# EAGLE board kombi_8relais04a (EAGLE 4.16)
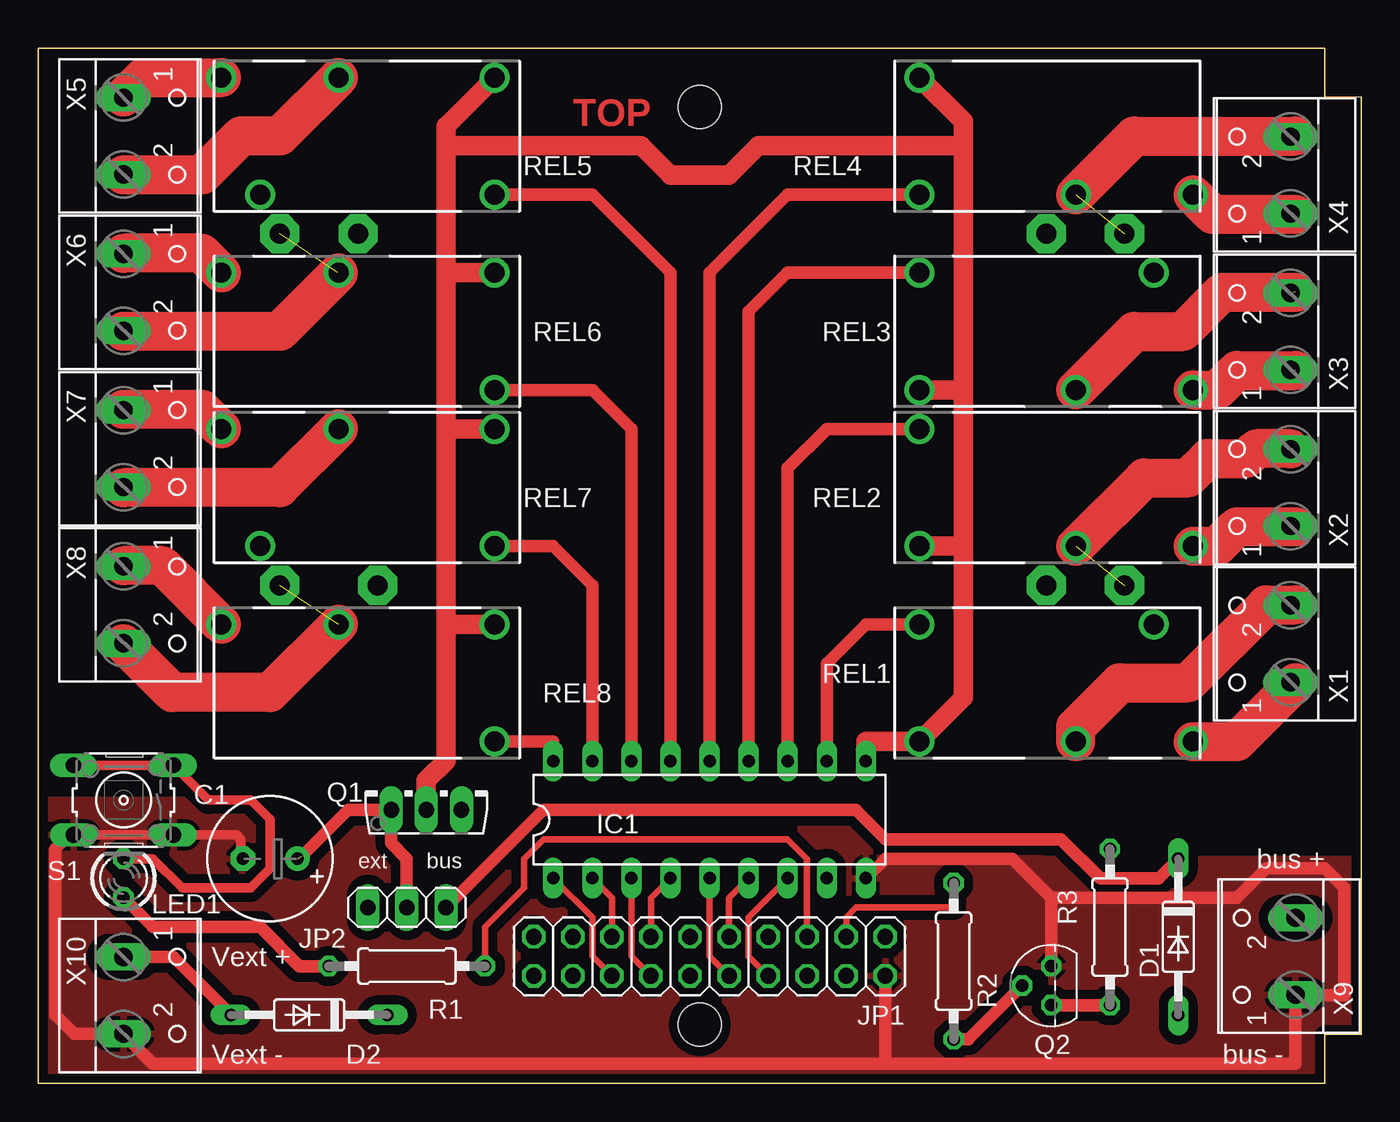
[diagram p0: board, top side]
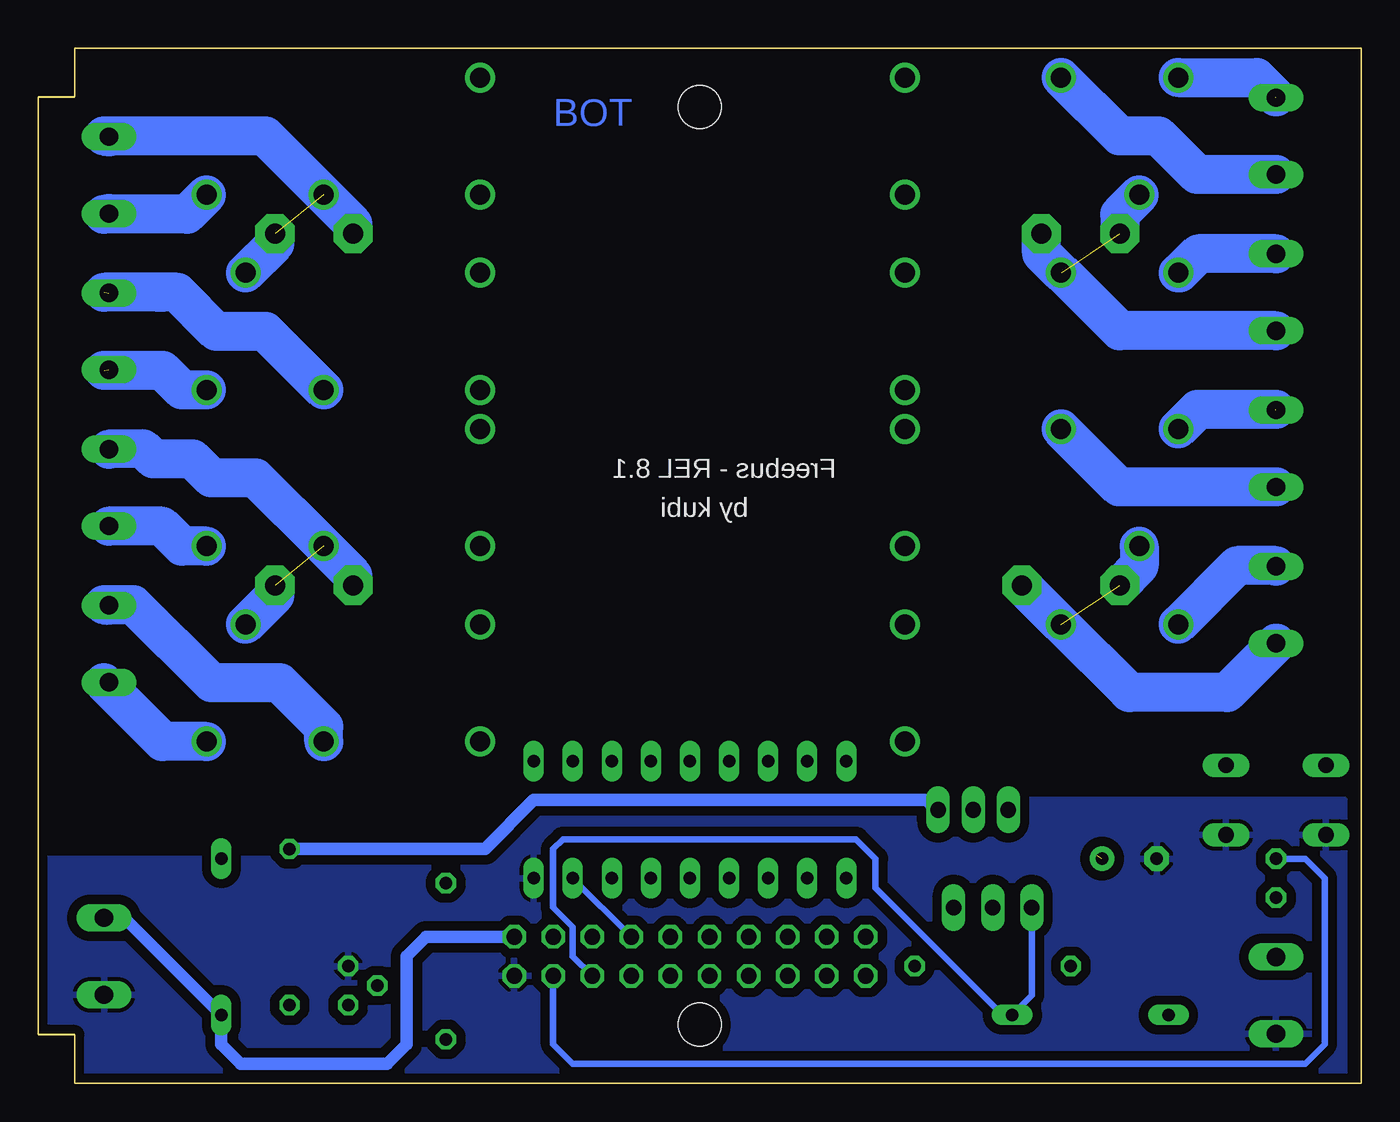
[diagram p1: board, bottom side, seen from below]

Size 86 x 67.31 mm. Coordinates in mm from the lower left corner, seen from the top.
Outline: 0,0.01 83.64,0 83.64,3.18 86,3.18 86,64.13 83.64,64.13 83.64,67.31 0,67.31 0,0.01
Copper layers (1*16): Top 0.035mm / dielectric 1.5mm / Bottom 0.035mm
Design rules "default": minimum track width 10mil, minimum drill 24mil, track to track 16mil, track to pad 12mil, pad to pad 16mil, via to via 16mil, smd to smd 8mil, copper to edge 20mil, drill to drill 10mil, minimum pad ring 10mil, minimum via ring 8mil, stop-mask expansion 4mil, vias tented up to drill 0mil, thermal gap 10mil
Holes 2.8 mm at 43,3.81 43,63.5
Milling: 8 lines

## Footprints (pad centres in the part's own frame; a part is rotated, then mirrored left to right if it is on the bottom)
E3,5-8 = drill 0.813 pad 1.6 round: + -1.778,0 | drill 0.813 pad 1.6 octagon: - 1.778,0
DO35-10 = drill 0.813 long: A 5.08,0; C -5.08,0
DIL18 = drill 0.813 long: 1 -10.16,-3.81; 2 -7.62,-3.81; 3 -5.08,-3.81; 4 -2.54,-3.81; 5 0,-3.81; 6 2.54,-3.81; 7 5.08,-3.81; 8 7.62,-3.81; 9 10.16,-3.81; 10 10.16,3.81; 11 7.62,3.81; 12 5.08,3.81; 13 2.54,3.81; 14 0,3.81; 15 -2.54,3.81; 16 -5.08,3.81; 17 -7.62,3.81; 18 -10.16,3.81
2X10 = drill 1.016 octagon: 1 -11.43,-1.27; 2 -11.43,1.27; 3 -8.89,-1.27; 4 -8.89,1.27; 5 -6.35,-1.27; 6 -6.35,1.27; 7 -3.81,-1.27; 8 -3.81,1.27; 9 -1.27,-1.27; 10 -1.27,1.27; 11 1.27,-1.27; 12 1.27,1.27; 13 3.81,-1.27; 14 3.81,1.27; 15 6.35,-1.27; 16 6.35,1.27; 17 8.89,-1.27; 18 8.89,1.27; 19 11.43,-1.27; 20 11.43,1.27
1X03 = drill 1.016 long: 1 -2.54,0; 2 0,0; 3 2.54,0
LED3MM = drill 0.813 octagon: A -1.27,0; K 1.27,0
TO126AV = drill 1.016 long: B 2.286,-1.27; C 0,-1.27; E -2.286,-1.27
TO92 = drill 0.813 octagon: 1 1.27,0; 2 0,1.905; 3 -1.27,0
0207/10 = drill 0.813 octagon: 1 -5.08,0; 2 5.08,0
G5Q_1_EU = drill 1.3 round: 11 1.27,-3.81; 12 6.35,3.81; 14 8.89,-3.81; A1 -8.89,-3.81; A2 -8.89,3.81
RE-SCHRACK = drill 1.3 round: 11 8.89,-3.81; 14 1.27,-3.81; A1 -8.89,-3.81; A2 -8.89,3.81
B3F-10XX = drill 1.016 long: 1 -3.251,2.261; 2 3.251,2.261; 3 -3.251,-2.261; 4 3.251,-2.261
W237-102 = drill 1.194 long: 1 -2.5,-1.27; 2 2.5,-1.27

## Placement (x,y rotation side)
C1  10µ  [E3,5-8]  15.06,14.61 180 top
D1  1N4148  [DO35-10]  74.11,9.53 270 top
D2  1N4148  [DO35-10]  17.6,4.45 180 top
IC1  ULN2803  [DIL18]  43.63,17.15 0 top
JP1  [2X10]  43.63,8.26 180 top
JP2  [1X03]  23.95,11.43 0 top
LED1  rot  [LED3MM]  5.54,13.33 90 top
Q1  BD138  [TO126AV]  25.22,19.05 0 top
Q2  BC547  [TO92]  65.86,6.35 90 top
R1  1k  [0207/10]  23.95,7.62 180 top
R2  10k  [0207/10]  59.51,7.94 270 top
R3  10k  [0207/10]  69.67,10.16 90 top
REL1  RE03U  [G5Q_1_EU]  66.18,26.04 0 top
REL2  G5Q-1A  [RE-SCHRACK]  66.18,38.73 0 top
REL3  RE03U  [G5Q_1_EU]  66.18,48.89 0 top
REL4  G5Q-1A  [RE-SCHRACK]  66.18,61.59 0 top
REL5  RE03U  [G5Q_1_EU]  20.77,61.59 180 top
REL6  G5Q-1A  [RE-SCHRACK]  20.77,48.89 180 top
REL7  RE03U  [G5Q_1_EU]  20.77,38.73 180 top
REL8  G5Q-1A  [RE-SCHRACK]  20.77,26.04 180 top
S1  push Prog  [B3F-10XX]  5.54,18.42 180 top
X1  [W237-102]  80.15,28.58 90 top
X2  [W237-102]  80.15,38.73 90 top
X3  [W237-102]  80.15,48.89 90 top
X4  [W237-102]  80.15,59.05 90 top
X5  [W237-102]  6.8,61.59 270 top
X6  [W237-102]  6.8,51.43 270 top
X7  [W237-102]  6.8,41.27 270 top
X8  [W237-102]  6.8,31.12 270 top
X9  [W237-102]  80.47,8.26 90 top
X10  [W237-102]  6.8,5.71 270 top

## Library data of the parts
C1 R1-R3 = rcl
D1 D2 = diode
IC1 = uln-udn
JP1 JP2 = pinhead
LED1 = led
Q1 = transistor-power
Q2 = transistor-npn
REL1 REL3 REL5 REL7 = freebus_relay
REL2 REL4 REL6 REL8 = relay
S1 = switch-omron
X1-X10 = con-wago-500

## Nets
GND: C1.- IC1.9 JP1.2 Q2.1 S1.1 S1.2 X9.1 X10.2
IO1: IC1.1 JP1.16
IO2: IC1.2 JP1.15
IO3: IC1.3 JP1.14
IO4: IC1.4 JP1.13
IO5: IC1.5 JP1.10
IO6: IC1.6 JP1.9
IO7: IC1.7 JP1.8
IO8: IC1.8 JP1.7
N$1: REL4.11 X4.1
N$3: REL3.14 X3.1
N$4: REL3.11 X3.2
N$5: REL2.11 X2.1
N$6: REL1.12 REL2.14 X2.2
N$7: REL1.14
N$8: REL1.11 X1.2
N$14: REL5.14 X5.1
N$17: D2.A X10.1
N$19: IC1.10 Q1.C REL1.A1 REL2.A1 REL3.A1 REL4.A2 REL5.A1 REL6.A1 REL7.A1 REL8.A1
N$20: D1.A JP1.1 X9.2
N$24: JP1.5 R1.1
N$27: JP1.4 LED1.K S1.3 S1.4
N$28: LED1.A R1.2
N$31: D2.C JP1.6 JP2.1
N$32: D1.C JP2.3
N$33: JP1.3 R2.1
N$37: Q1.B R3.2
N$38: Q2.3 R3.1
N$39: Q2.2 R2.2
R1: IC1.14 REL4.A1
R2: IC1.13 REL3.A2
R3: IC1.12 REL2.A2
R4: IC1.11 REL1.A2
R5: IC1.15 REL5.A2
R6: IC1.16 REL6.A2
R7: IC1.17 REL7.A2
R8: IC1.18 REL8.A2
S$1: REL5.11 X5.2
S$2: REL6.11 X6.1
S$3: REL5.12 REL6.14 X6.2
S$4: REL7.14 X7.1
S$5: REL7.11 X7.2
S$6: REL8.11 X8.1
S$7: REL7.12 REL8.14 X8.2
S$8: REL3.12 REL4.14 X4.2
VDD: C1.+ JP2.2 Q1.E

## Tracks (layer width: path | path; a pad name or v marks a point on that pad's centre or on a via)
GND
  Top 0.406: 3.27,16.15 3,15.88 2.72,16.15 S1.2
  Top 0.61: 2,16.15 S1.2 | 3.27,16.15 S1.1 12.88,16.15 13.15,15.88 13.15,14.73 arc90 C1.- | 81.73,5.71 X9.1
  Top 0.813: 55.06,1.27 7.44,1.27 5.54,3.17 X10.2 2.32,3.21 1.09,4.45 1.09,15.24 2,16.15 | 55.06,1.27 81.73,1.27 81.73,5.71 84.91,5.71 84.91,12.7 83.64,13.97 79.83,13.97 77.92,12.06 65.86,12.06 | 65.86,12.06 63.32,14.61 55.06,14.61 IC1.9 | 65.86,12.06 Q2.1 | 55.06,1.27 JP1.2
  pour Top (isolate 0.61): 0.46,18.42 27.76,18.42 27.12,18.42 62.68,18.42 65.22,14.61 85.55,14.61 85.55,3.81 83,3.81 83,0.64 0.46,0.64
  pour Bottom (isolate 0.61): 1.09,0.64 1.09,18.42 62.68,18.42 65.22,14.61 85.55,14.61 85.55,3.81 83,3.81 83,0.64
IO1
  Top 0.406: IC1.1 36.02,10.79 36.02,8.26 JP1.16
IO2
  Top 0.406: JP1.15 37.28,12.06 IC1.2
IO3
  Top 0.406: IC1.3 38.55,8.26 JP1.14
IO4
  Top 0.406: JP1.13 39.82,12.06 IC1.4
IO5
  Top 0.406: IC1.5 43.63,8.26 JP1.10
IO6
  Top 0.406: JP1.9 44.91,12.06 IC1.6
IO7
  Top 0.406: IC1.7 46.17,10.79 46.17,8.26 JP1.8
IO8
  Bottom 0.406: JP1.7 IC1.8
N$1
  Top 2.54: REL4.11 76.34,56.52 81.73,56.52
  Bottom 2.54: X4.1 81.73,56.52 76.34,56.52 REL4.11
N$3  (1 unrouted)
  Top 2.54: REL3.14 76.66,45.09 77.92,46.35 81.73,46.35
  Bottom 2.54: 81.73,46.35 77.92,46.35 76.66,45.09 REL3.14
N$4  (1 unrouted)
  Top 2.54: REL3.11 71.26,48.89 74.43,48.89 76.97,51.43 81.73,51.43
  Bottom 2.54: 78.24,51.43 77.92,51.43 | 78.24,51.43 81.73,51.43 | REL3.11 71.26,48.89 74.43,48.89 76.97,51.43 78.24,51.43
N$5
  Top 2.54: REL2.11 76.66,34.92 77.92,36.2 81.73,36.2
  Bottom 2.54: X2.1 77.97,36.23 76.66,34.92 REL2.11
N$6  (via drill 1.3 pad 2.54)  (1 unrouted)
  Top 2.54: REL2.14 71.89,39.37 74.75,39.37 76.02,40.63 78.56,40.64 79.19,41.27 81.42,41.27
  Bottom 2.54: v65.54,32.38 65.54,33.02 REL2.14 71.89,39.37 74.75,39.37 75.98,40.6 78.52,40.6 79.19,41.27 X2.2 | v70.62,32.38 70.62,31.75 REL1.12
N$7
  Top 2.54: 81.73,26.04 77.92,22.23 REL1.14
  Bottom 2.54: 81.73,26.04 77.92,22.23 REL1.14
N$8
  Top 2.54: REL1.11 67.45,23.18 70.3,26.04 74.75,26.04 79.83,31.12 81.73,31.12
  Bottom 2.54: REL1.11 67.45,23.18 70.3,26.04 74.75,26.04 79.83,31.12 81.73,31.12 X1.2
N$14  (1 unrouted)
  Top 2.54: 5.54,64.14 6.8,65.41 REL5.14
  Bottom 2.54: 5.54,64.14 6.8,65.41 REL5.14
N$17
  Top 0.813: X10.1 8.67,8.21 8.75,8.21 D2.A
N$19
  Top 1.27: IC1.10 53.8,22.23 REL1.A1 60.14,25.08 60.14,34.92 | 60.14,45.09 60.14,34.92 | 60.14,34.92 REL2.A1 | 60.14,45.09 REL3.A1 | 60.14,60.96 60.14,45.09 | Q1.C 25.22,19.69 26.49,20.96 26.49,29.85 | 26.49,29.85 REL8.A1 | 26.49,42.54 REL7.A1 | 26.49,29.85 26.49,42.54 | 26.49,52.7 REL6.A1 | REL5.A1 26.49,62.23 26.49,60.96 | 26.49,42.54 26.49,52.7 | 26.49,52.7 26.49,60.96 | 26.49,60.96 39.19,60.96 41.09,59.05 44.91,59.05 46.81,60.96 60.14,60.96 | 60.14,60.96 60.14,62.55 REL4.A2
N$20
  Bottom 0.61: 80.42,10.75 X9.2
  Bottom 0.813: 80.42,10.75 D1.A 74.11,2.54 72.84,1.27 63.32,1.27 62.05,2.54 62.05,8.26 60.78,9.53 JP1.1
N$24
  Top 0.406: JP1.5 49.98,14.61 48.71,15.88 32.84,15.88 31.57,14.61 31.57,12.7 29.03,10.16 R1.1
N$27
  Top 0.406: 8.71,20.75 arc90 S1.3
  Top 0.61: LED1.K 7.44,14.61 9.35,12.7 13.79,12.7 15.06,13.97 15.06,17.15 13.79,18.42 11.05,18.42 8.71,20.75 | S1.3 S1.4
  Bottom 0.406: JP1.4 52.52,2.54 51.25,1.27 3.63,1.27 2.36,2.54 2.36,13.33 3.63,14.61 LED1.K
N$28
  Top 0.813: LED1.A 7.44,10.16 14.43,10.16 16.96,7.62 R1.2
N$31
  Bottom 0.406: JP1.6 51.25,8.26 51.25,10.16 52.52,11.43 52.52,15.24 51.89,15.88 32.84,15.88 31.57,14.61 31.57,12.7 23.31,4.45 D2.C 21.41,5.71 JP2.1
N$32
  Top 0.813: D1.C 72.84,13.33 69.03,13.33 66.5,15.88 55.06,15.88 53.16,17.78 32.84,17.78 JP2.3
N$33
  Top 0.406: JP1.3 52.52,10.79 53.16,11.43 59.51,11.43 R2.1
N$37
  Bottom 0.61: Q1.B 27.44,17.78 27.76,17.78 28.39,18.42
  Bottom 0.813: R3.2 56.97,15.24 53.8,18.42 28.39,18.42
N$38
  Top 0.813: Q2.3 R3.1
N$39
  Top 0.813: Q2.2 60.46,2.86 R2.2
R1
  Top 0.813: IC1.14 43.63,52.7 48.71,57.78 REL4.A1
R2
  Top 0.813: IC1.13 46.17,50.16 48.71,52.7 REL3.A2
R3
  Top 0.813: IC1.12 48.71,40 51.25,42.54 REL2.A2
R4
  Top 0.813: IC1.11 51.25,27.31 53.8,29.85 REL1.A2
R5
  Top 0.813: IC1.15 41.09,52.7 36.02,57.78 REL5.A2
R6
  Top 0.813: IC1.16 38.55,42.54 36.02,45.09 REL6.A2
R7
  Top 0.813: IC1.17 36.02,32.38 33.48,34.92 REL7.A2
R8
  Top 0.813: IC1.18 33.48,22.23 REL8.A2
S$1
  Top 2.54: 5.54,59.05 10.62,59.05 13.15,61.59 15.7,61.59 REL5.11
  Bottom 2.54: X5.2 10.65,59.09 13.15,61.59 15.7,61.59 REL5.11
S$2
  Top 2.54: 5.54,53.98 10.62,53.98 REL6.11
  Bottom 2.54: X6.1 10.57,53.93 11.8,52.7 REL6.11
S$3  (via drill 1.3 pad 2.54)  (1 unrouted)
  Top 2.54: 5.54,48.89 15.7,48.89 REL6.14
  Bottom 2.54: X6.2 15.7,48.93 19.46,52.7 REL6.14 20.77,53.98 v20.77,55.24 | REL5.12 15.7,56.52 v15.7,55.24
S$4  (1 unrouted)
  Top 2.54: REL7.14 10.62,43.81 5.54,43.81
  Bottom 2.54: REL7.14 10.62,43.81 5.54,43.81
S$5
  Top 2.54: 5.54,38.73 15.7,38.73 REL7.11
  Bottom 2.54: X7.2 15.73,38.77 REL7.11
S$6
  Top 2.54: 5.54,33.66 8.07,33.66 REL8.11
  Bottom 2.54: X8.1 5.54,33.66 8.07,33.66 REL8.11
S$7  (via drill 1.3 pad 2.54)  (1 unrouted)
  Top 2.54: 5.54,28.58 8.71,25.4 15.06,25.4 REL8.14
  Bottom 2.54: X8.2 5.5,28.62 8.71,25.4 15.06,25.4 15.06,25.44 15.1,25.44 REL8.14 v22.04,32.38 | v15.7,32.38 14.43,33.66 REL7.12
S$8  (via drill 1.3 pad 2.54)  (1 unrouted)
  Top 2.54: 81.73,61.59 71.26,61.59 REL4.14
  Bottom 2.54: X4.2 81.73,61.59 71.26,61.59 REL4.14 65.54,55.88 v65.54,55.24 | v70.62,55.24 70.62,54.61 REL3.12
VDD  (1 unrouted)
  Top 0.813: 17.16,14.8 20.14,17.78 Q1.E 22.93,15.62 23.95,14.61 JP2.2

## Text on the board
Top: TOP
Bottom: BOT
tPlace: ext | bus | bus + | Vext + | Vext - | bus -
bPlace: Freebus - REL 8.1 | by kubi